# Altium PCB MB1455.PcbDoc (part 1 of 2)
Units mm, origin at the board's own origin, x right, y up, seen from the top; angles counter-clockwise.
Board outline 18.54 x 50.29 mm, 4 copper layers (Top Layer, Inner 1, Inner 2, Bottom Layer), stack 1.577 mm thick; 92 components, 84 nets, 350 pads, 195 vias.
Unrouted connection lines stored in the file: 7.
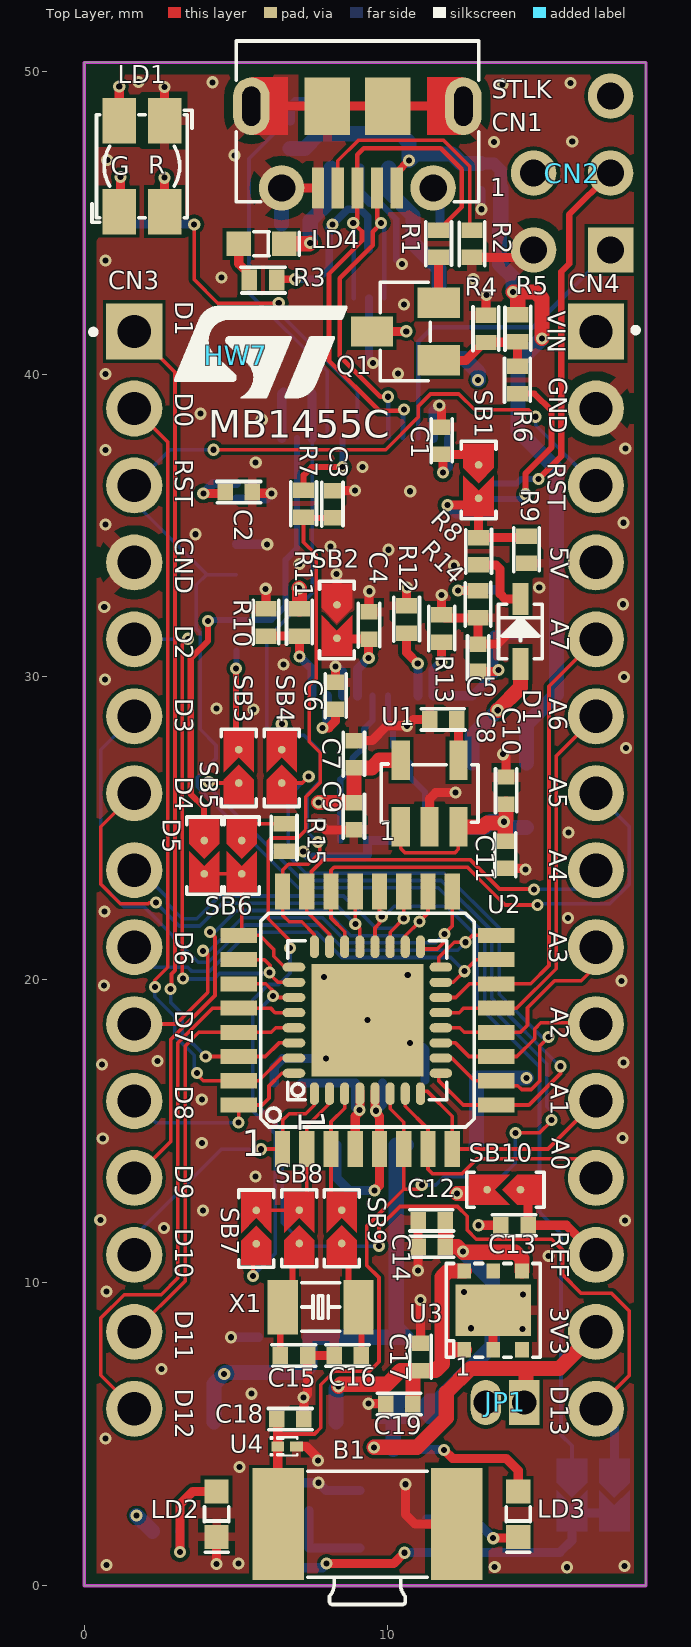
[diagram p0: Top Layer view]
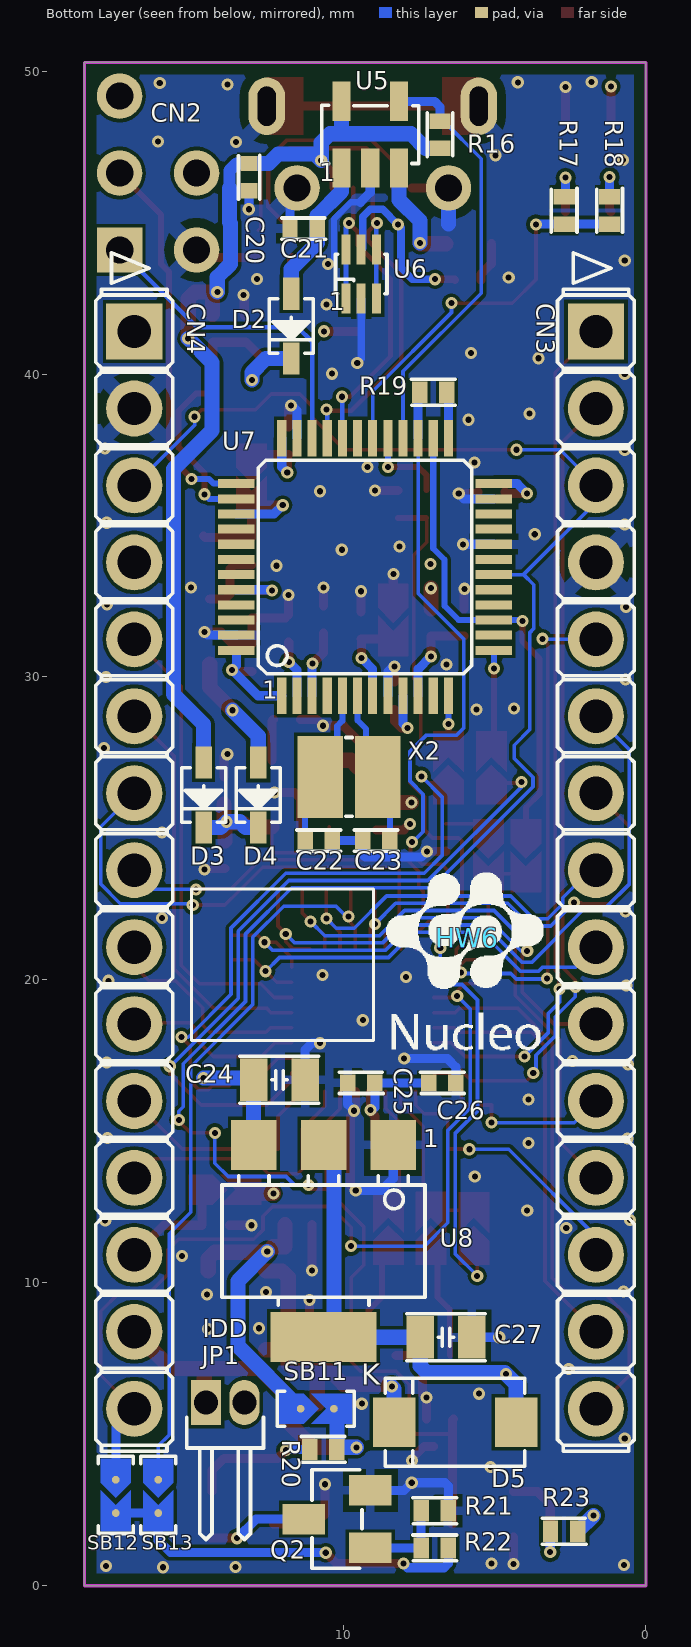
[diagram p1: Bottom Layer view, seen from below]
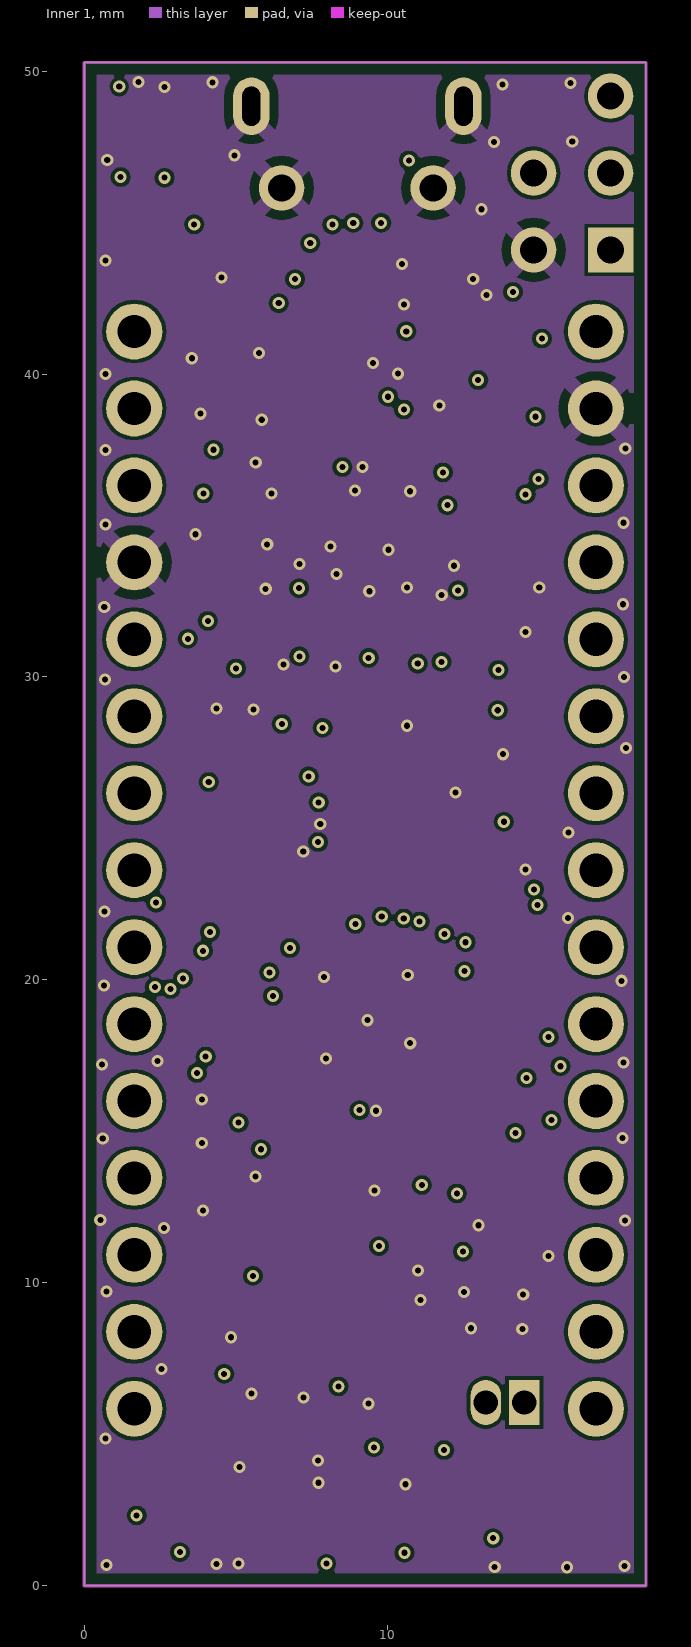
[diagram p2: Inner 1]
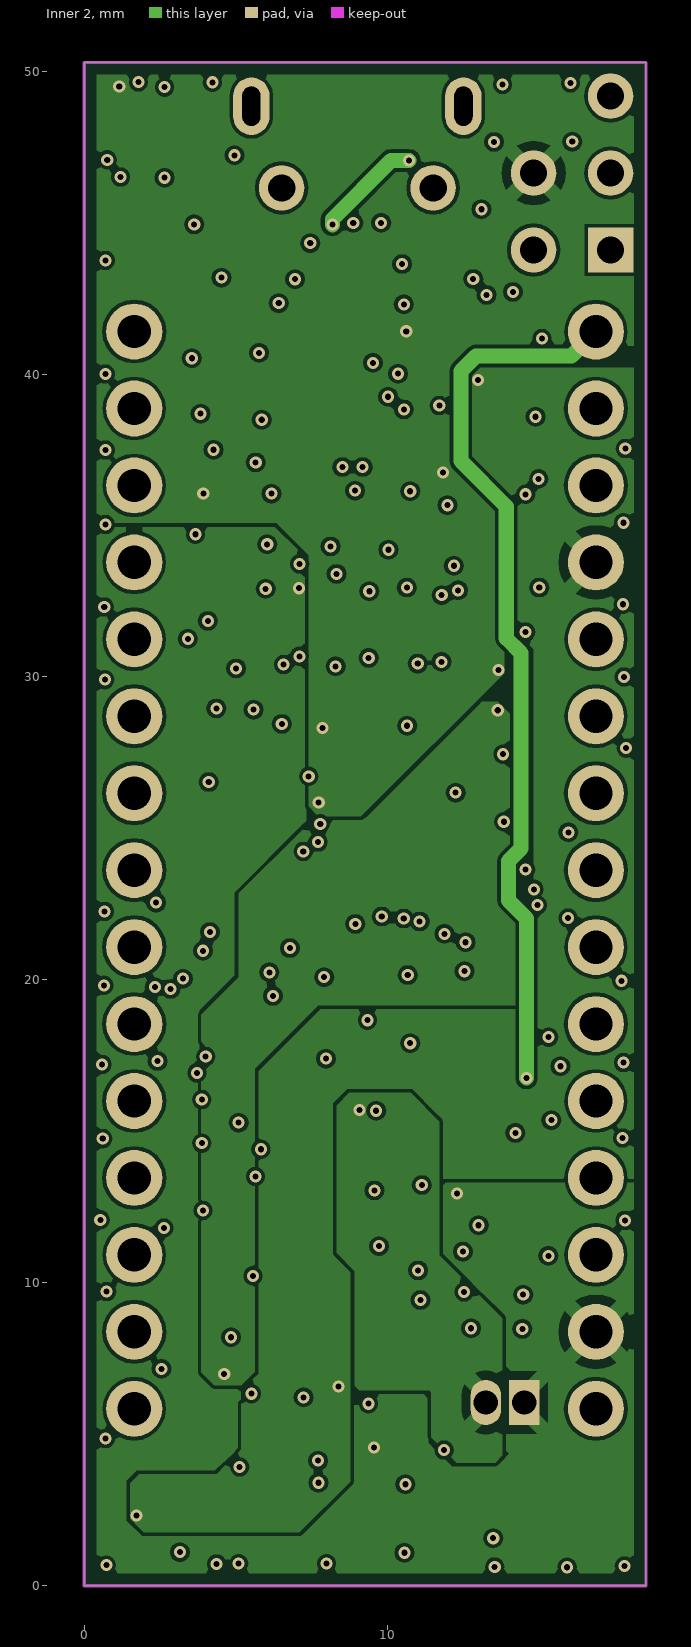
[diagram p3: Inner 2]
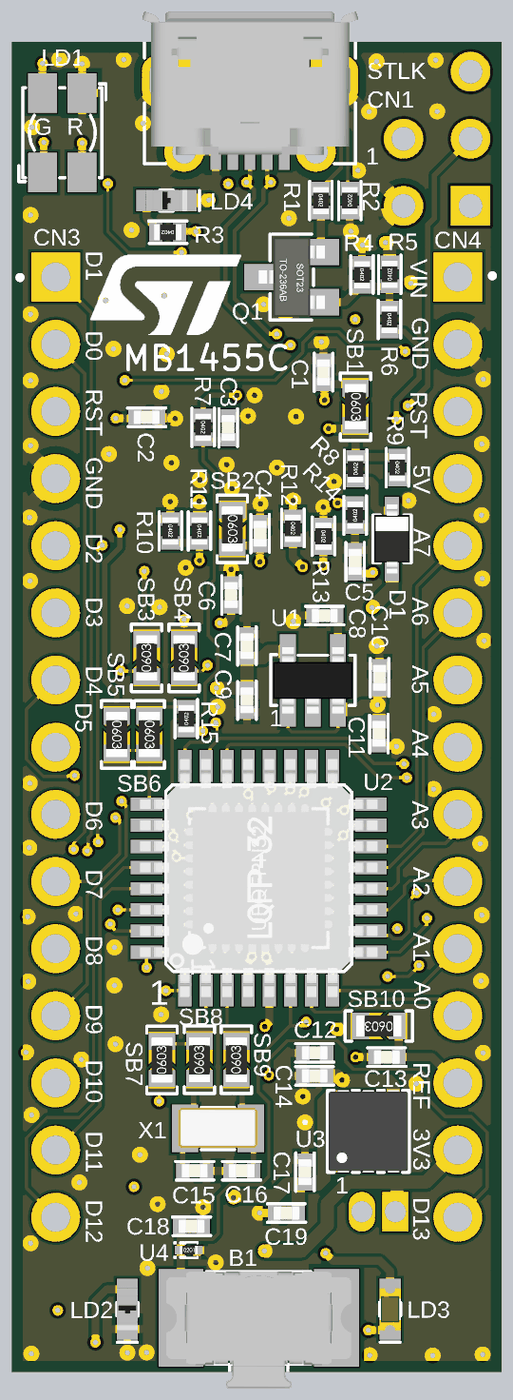
[diagram p5: 3D render of the assembled board from above, using the file's embedded part models]
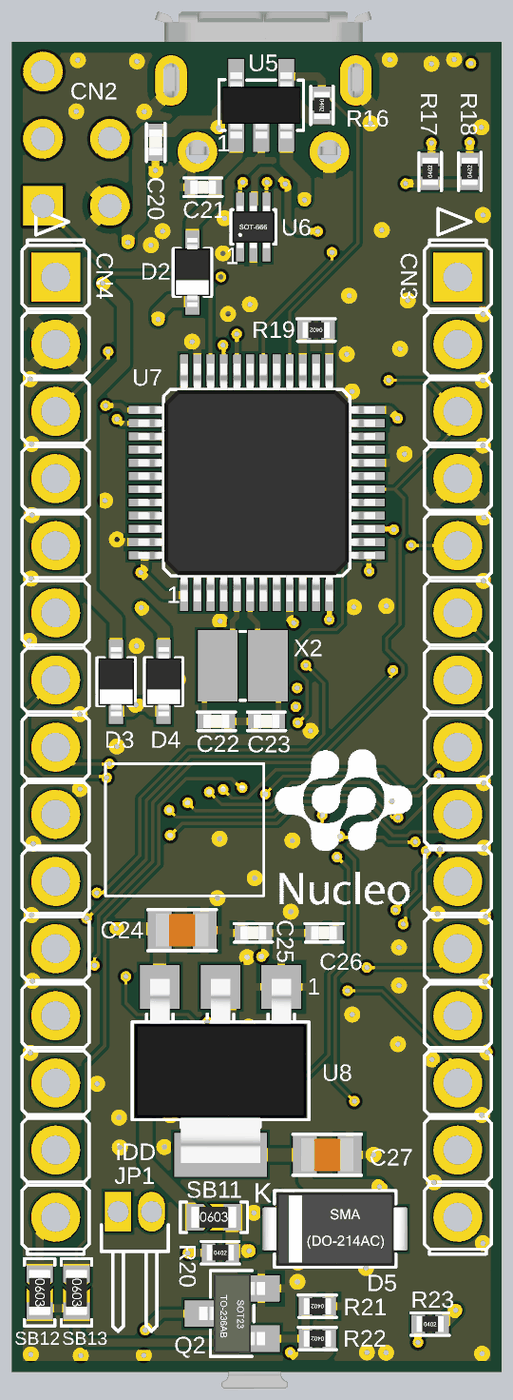
[diagram p6: 3D render of the assembled board from below, using the file's embedded part models]

## Layer stack, top to bottom
Top Solder: solder mask 0.015, Solder Resist, Dk 3.5
Top Layer: signal copper 0.035
Dielectric 1: core 0.254, FR-4, Dk 4.2
Inner 1: signal copper 0.036
Dielectric 3: prepreg 0.927, Dk 4.2
Inner 2: signal copper 0.036
Dielectric 2: core 0.254, Dk 4.2
Bottom Layer: signal copper 0.035
Bottom Solder: solder mask 0.015, Solder Resist, Dk 3.5

## Board outline
0,0 18.542,0 18.542,50.292 0,50.292

## Design rules (kind name [scope] priority, off if disabled: settings)
BoardOutlineClearance [OnLayer('Top Layer') or OnLayer('Bottom Layer') or OnLayer('Inner 1') or OnLayer('Inner 2')] p1: gap=0.4 ignorepadtopadclearanceinfootprint=FALSE
Clearance [All] p1: gap=0.12 ignorepadtopadclearanceinfootprint=FALSE
ComponentClearance [All] p1: gap=0.2 collisioncheckmode=3 verticalgap=0.2 showdistances=FALSE
DiffPairsRouting [All] p1: maxlimit=0.254 minlimit=0.2 mostfreqgap=0.254 toplayer_minwidth=0.152 toplayer_maxwidth=0.381 toplayer_prefwidth=0.381 midlayer1_minwidth=0.152 midlayer1_maxwidth=0.381 midlayer1_prefwidth=0.381 midlayer2_minwidth=0.152 midlayer2_maxwidth=0.381 midlayer2_prefwidth=0.381 bottomlayer_minwidth=0.152 bottomlayer_maxwidth=0.381 bottomlayer_prefwidth=0.381 maxuncoupledlength=25
HoleSize [All] p1: absolutevalues=TRUE maxlimit=10 minlimit=0.025 maxpercent=80.000 minpercent=20.000
MinimumSolderMaskSliver [All] p1: minsoldermaskwidth=0.1
PlaneConnect [All] p1: planeconnectstyle=Relief reliefexpansion=0.508 reliefentries=4 reliefconductorwidth=0.21 reliefairgap=0.21
PolygonConnect [All] p1: thpad.connectstyle=Relief thpad.reliefconductorwidth=0.5 thpad.reliefentries=4 thpad.polygonreliefangle="45 Angle" thpad.airgapwidth=0.3 smdpad.connectstyle=Relief smdpad.reliefconductorwidth=0.3 smdpad.reliefentries=4 smdpad.polygonreliefangle="90 Angle" smdpad.airgapwidth=0.2 via.connectstyle=Direct via.reliefconductorwidth=0.2 via.reliefentries=4 via.polygonreliefangle="90 Angle" via.airgapwidth=0.2
RoutingVias [All] p1: holewidth=0.3 width=0.8 viastyle="Through Hole" minholewidth=0.2 minwidth=0.4 maxholewidth=0.3 maxwidth=1.5
SilkToSilkClearance [All] p1: silktosilkclearance=0.1
SilkToSolderMaskClearance [IsPad] p1: minsilkscreentomaskgap=0.2 clearancetoexposedcopper=TRUE
SolderMaskExpansion SolderMaskExpansion_via [IsVia] p1: expansion=0.05 soldermaskfromhole=TRUE
SolderMaskExpansion [All] p2: expansion=0.102
Width [All] p1: maxlimit=1 minlimit=0.12 preferedwidth=0.254 toplayer_prefwidth=0.2 midlayer1_maxwidth=0.512 midlayer2_maxwidth=0.512 bottomlayer_prefwidth=0.2 minimp=50.000000 maximp=50.000000 favimp=50.000000
23 further rules are at their usual default settings.

## Classes and differential pairs
component class Mechanical: HW3 HW6 HW7
component class U_Power: C7 C8 C9 C10 C11 C12 C14 C17 C19 C24 C27 D2 D3 D4 D5 JP1 LD2 R23 SB11 U1 U3 U8
component class U_ST_LINK_V2-1: C1 C2 C3 C4 C5 C6 C20 C21 C22 C23 CN1 CN2 D1 LD1 LD4 Q1 R1 R2 R3 R4 R5 R6 R7 R8 R9 R10 R11 R12 R13 R14 R16 R17 R18 R19 SB1 SB2 SB3 SB4 U5 U6 U7 X2
component class U_STM32G0_microcontroller: B1 C13 C15 C16 C18 C25 C26 CN3 CN4 LD3 Q2 R15 R20 R21 R22 SB5 SB6 SB7 SB8 SB9 SB10 SB12 SB13 U2 U4 X1
differential pair STLK_USB_D: +STLK_USB_D_P -STLK_USB_D_N

## Components (designator, comment, footprint, x,y, rotation, side; value= is the part's Value field where it differs from the comment)
B1 "SW-PB" SWI_C&K_ITT_KSS221G 9.347,2.032 r0 top locked value=KSS221GLFS
C1 "Capacitor" C0402 11.8,37.8 r270 top value=100nF
C2 "Capacitor" C0402 5.1,36.1 r180 top value=100nF
C3 "Capacitor" C0402 8.19,35.7 r270 top value=20pF
C4 "Capacitor" C0402 9.4,31.7 r270 top value=100nF
C5 "Capacitor" C0402 13,30.634 r270 top value=100nF
C6 "Capacitor" C0402 8.3,29.38 r270 top value=100nF
C7 "Capacitor" C0402 8.9,27.45 r270 top value=100nF
C8 "Capacitor" C0402 11.85,28.6 r0 top value=10nF
C9 "Capacitor" C0402 8.9,25.4 r90 top value=1uF
C10 "Capacitor" C0402 13.926,26.248 r270 top value=1uF
C11 "Capacitor" C0402 13.9,24.132 r90 top value=100nF
C12 "Capacitor" C0402 11.47,12.06 r0 top value=1uF
C13 "Capacitor" C0402 14.2,11.9 r0 top value=100nF
C14 "Capacitor" C0402 11.47,11.19 r0 top value=100nF
C15 "Capacitor" C0402 6.921,7.6 r180 top value=5.6pF
C16 "Capacitor" C0402 8.7,7.6 r0 top value=5.6pF
C17 "Capacitor" C0402 11.1,7.55 r270 top value=100nF
C18 "Capacitor" C0402 6.8,5.5 r180 top value=100nF
C19 "Capacitor" C0402 10.4,6 r0 top value=1uF
C20 "Capacitor" C0402 13.1,46.5 r90 bottom value=1uF
C21 "Capacitor" C0402 11.3,44.8 r180 bottom value=100nF
C22 "Capacitor" C0402 10.8,24.6 r0 bottom value=10pF
C23 "Capacitor" C0402 8.9,24.6 r180 bottom value=10pF
C24 "Capacitor" C0805 12.1,16.7 r0 bottom value=10uF
C25 "Capacitor" C0402 9.4,16.6 r180 bottom value=100nF
C26 "Capacitor" C0402 6.722,16.6 r0 bottom value=4.7uF
C27 "Capacitor" C0805 6.6,8.204 r0 bottom value=10uF
CN1 "USB_uB_105017.0001" CON_USBMICROB_MOLEX_105017-0001_H2P90 9.017,50.292 r180 top locked value=USB_uB_105017-0001
CN2 "Header STLINK" HDR_1x5_2R54_V_M 17.374,44.094 r90 top locked
CN3 "Header 15x1" CON_LYCN_313115S161145 1.651,23.622 r270 bottom locked value="Header 15X1"
CN4 "Header 15x1" CON_LYCN_313115S161145 16.891,23.622 r270 bottom locked value="Header 15X1"
D1 "BAT60JFILM" DIO_SOD323 14.4,31.5 r90 top
D2 "BAT60JFILM" DIO_SOD323 11.71,41.58 r270 bottom
D3 "BAT60JFILM" DIO_SOD323 14.6,26.1 r270 bottom
D4 "BAT60JFILM" DIO_SOD323 12.8,26.1 r270 bottom
D5 "STPS1L40M" DIO_SMA_1A_2K 6.3,5.4 r180 bottom locked value=STPS1L30A
HW6 "Logo" LOGO_NUCLEO 5.9,21.39 r180 bottom value="LOGO NUCLEO"
HW7 "Logo" ST_LOGO_5mm 5,40.6 r0 top value="LOGO ST"
JP1 "Jumper_Header1.27 2x1 Fitted" CON_WP_707-2-02-2-20-00 13.89,6.05 r180 top value="Shunt Fitted"
LD1 "LD_BICOLOR_CMS" LED_BI-GR_HSMF-A201-A00J1 1.905,46.863 r180 top locked
LD2 "LED_red" LED_0603_RED_H0P4 4.369,2.362 r270 top locked value=RED
LD3 "LED_green" LED_0603_GREEN 14.326,2.362 r270 top locked value=GREEN
LD4 "LED_red" LED_0603_RED_H0P4 5.85,44.3 r0 top value=RED
Q1 "9013-SOT23" NPN_SOT23 10.6,41.402 r90 top value="NPN SOT23"
Q2 "9013-SOT23" NPN_SOT23 10.2,2.2 r90 bottom value="NPN SOT23"
R1 "Resistor" R0402 11.7,44.3 r270 top value=1K5
R2 "Resistor" R0402 12.8,44.3 r90 top value=100K
R3 "Resistor" R0402 5.9,43.1 r180 top value=1K
R4 "Resistor" R0402 13.26,41.49 r270 top value=36K
R5 "Resistor" R0402 14.313,41.51 r90 top value=10K
R6 "Resistor" R0402 14.3,39.8 r270 top value=100R
R7 "Resistor" R0402 7.24,35.72 r270 top value=100R
R8 "Resistor" R0402 13.017,34.15 r90 top value=2K7
R9 "Resistor" R0402 14.6,34.2 r270 top value=4K7
R10 "Resistor" R0402 6,31.8 r270 top value=4K7
R11 "Resistor" R0402 7.1,31.8 r270 top value=4K7
R12 "Resistor" R0402 10.643,31.9 r270 top value=10K
R13 "Resistor" R0402 11.8,31.6 r270 top value=10K
R14 "Resistor" R0402 13,32.4 r90 top value=100K
R15 "Resistor" R0402 6.6,24.7 r90 top value=10K
R16 "Resistor" R0402 6.8,47.9 r270 bottom value=10K
R17 "Resistor" R0402 2.7,45.4 r90 bottom value=330R
R18 "Resistor" R0402 1.2,45.4 r90 bottom value=330R
R19 "Resistor" R0402 7.021,39.4 r0 bottom value=100R
R20 "Resistor" R0402 10.65,4.5 r180 bottom value=510R
R21 "Resistor" R0402 6.971,2.475 r0 bottom value=100K
R22 "Resistor" R0402 6.971,1.25 r0 bottom value=47K
R23 "Resistor" R0402 2.7,1.8 r180 bottom value=1K
SB1 "SB_OFF" SOLDER-BRIDGE_R0603-0R 13.017,36.5 r270 top
SB2 "SB_OFF" SOLDER-BRIDGE_R0603-0R 8.343,31.88 r270 top
SB3 "SB_ON" SOLDER-BRIDGE_R0603-0R 5.1,27 r90 top
SB4 "SB_ON" SOLDER-BRIDGE_R0603-0R 6.521,27 r90 top
SB5 "SB_ON" SOLDER-BRIDGE_R0603-0R 3.96,24.1 r270 top
SB6 "SB_OFF" SOLDER-BRIDGE_R0603-0R 5.2,24.1 r270 top
SB7 "SB_OFF" SOLDER-BRIDGE_R0603-0R 5.68,11.79 r90 top
SB8 "SB_ON" SOLDER-BRIDGE_R0603-0R 7.1,11.8 r90 top
SB9 "SB_ON" SOLDER-BRIDGE_R0603-0R 8.5,11.8 r90 top
SB10 "SB_ON" SOLDER-BRIDGE_R0603-0R 13.9,13.075 r180 top
SB11 "SB_ON" SOLDER-BRIDGE_R0603-0R 10.9,5.842 r180 bottom
SB12 "SB_OFF" SOLDER-BRIDGE_R0603-0R 17.5,3 r270 bottom
SB13 "SB_ON" SOLDER-BRIDGE_R0603-0R 16.1,3 r270 bottom
U1 "LDK120M33R" REG_SOT23-5L 11.4,26.15 r0 top
U2 "STM32G031K8T6U" ICC_LQFP32_7X7_P080__UFQFPN32-EPAD_5X5_P050__DI 9.347,18.669 r0 top
U3 "LD39050PU33R" ICC_DFN6-EPAD_3X3_P095 13.5,9.09 r0 top
U4 "ESD-TRANSIL" ESD_ST0201 6.7,4.6 r0 top value=ESDALC6V1-1U2
U5 "STMPS2141STR" MOS_SOT23-5L 9.1,47.9 r180 bottom
U6 "USBLC6-2P6" ESD_SOT666 9.4,43.3 r180 bottom
U7 "STM32F103CBT6" ICC_LQFP48_7X7_P050 9.271,33.63 r180 bottom locked
U8 "LD1117S50TR" REG_SOT223-TAB 10.643,11.379 r0 bottom
X1 "XTAL_2_PINS" CRY_NX3215SA_2P 7.8,9.2 r0 top value="NX3215SA 32.768KHz"
X2 "XTAL_2_PINS" CRY_NX3225GD_2P 9.8,26.7 r180 bottom value="NX3225GD 8MHz"

## Footprints (in the part's own frame and the unit in brackets; to place one, negate y for a bottom-side part, rotate by r counter-clockwise, add the part's x,y. Pads: shape width x height; smd on the part's side, far side on the other; paste and mask are expansions set on the pad)
C0402 [mm]
  rect 0.51x0.56 smd mask+0.05: 1(-0.45,0) 2(0.45,0)
  silkscreen extent -0.72,-0.35 0.72,0.35, body extent -0.5,-0.3 0.5,0.3, height 0.4
C0805 [mm]
  rect 0.9x1.4 smd mask+0.05: 1(-0.85,0) 2(0.85,0)
  silkscreen extent -1.3,-0.77 1.3,0.77, body extent -1.1,-0.7 1.1,0.7, height 1.35
CON_LYCN_313115S161145 [mm]
  rect 1.85x1.85 / inner round 1.85 / far side rect 1.85x1.85 hole 1.1 mask+0.05: 1(-17.78,0)
  round 1.85 hole 1.1 mask+0.05: 2(-15.24,0) 3(-12.7,0) 4(-10.16,0) 5(-7.62,0) 6(-5.08,0) 7(-2.54,0) 8(0,0) 9(2.54,0) 10(5.08,0) 11(7.62,0) 12(10.16,0) 13(12.7,0) 14(15.24,0) 15(17.78,0)
  silkscreen extent -20.38,-1.27 19.18,1.27, body extent -19.18,-1.27 19.18,1.27, height 8.5
CON_USBMICROB_MOLEX_105017-0001_H2P90 [mm]
  rect 0.4x1.35 smd mask+0.05: 1(-1.3,4.15) 2(-0.65,4.15) 3(0,4.15) 4(0.65,4.15) 5(1.3,4.15)
  round 1.5 hole 0.9 mask+0.05: 6(-2.5,4.15) 7(2.5,4.15)
  oval 1.2x1.9 hole 0.6 slot 1.3 at 90 deg mask+0.05: 8(3.5,1.45) 9(-3.5,1.45)
  rect 1.5x1.9 smd mask+0.05: 10(-1,1.45) 11(1,1.45)
  Top Layer region: 2.3,2.4 3.5,2.4 3.5,0.5 2.3,0.5
  Top Layer region: -3.5,2.4 -2.3,2.4 -2.3,0.5 -3.5,0.5
  silkscreen extent -4,-0.7 4,4.6, body extent -4.1,-1.15 4.1,4.66, height 2.9
CON_WP_707-2-02-2-20-00 [mm]
  rect 1x1.5 hole 0.8 mask+0.05: 1(-0.635,0)
  oval 1x1.5 hole 0.8 mask+0.05: 2(0.635,0)
CRY_NX3215SA_2P [mm]
  rect 1x1.8 smd mask+0.05: 1(-1.25,0) 2(1.25,0)
  silkscreen extent -0.63,-0.8 0.63,0.8, body extent -1.65,-0.8 1.65,0.8, height 0.9
CRY_NX3225GD_2P [mm]
  rect 1.5x2.7 smd mask+0.05: 1(-0.95,0) 2(0.95,0)
  silkscreen extent -0.1,-1.3 0.1,1.3, body extent -1.65,-1.3 1.65,1.3, height 1
DIO_SMA_1A_2K [mm]
  rect 1.4x1.64 smd mask+0.05: 1(2.015,0) 2(-2.015,0)
  silkscreen extent -2.3,-1.45 2.3,1.45, body extent -2.75,-1.45 2.75,1.45, height 2.7
DIO_SOD323 [mm]
  rect 1.06x0.54 smd mask+0.05: 1(-1.07,0) 2(1.07,0)
  silkscreen extent -0.9,-0.72 0.9,0.72, body extent -1.3,-0.78 1.3,0.78, height 1.17
ESD_SOT666 [mm]
  rect 0.3x0.99 smd mask+0.05: 1(-0.5,-0.805) 2(0,-0.805) 3(0.5,-0.805) 4(0.5,0.805) 5(0,0.805) 6(-0.5,0.805)
  silkscreen extent -0.85,-0.65 0.85,0.65, body extent -0.85,-0.8 0.85,0.8, height 0.6
ESD_ST0201 [mm]
  rect 0.425x0.33 smd mask+0.05: 1(-0.312,0) 2(0.312,0)
  silkscreen extent -0.55,-0.3 0.33,0.3, body extent -0.34,-0.18 0.34,0.18, height 0.34
HDR_1x5_2R54_V_M [mm] "Header IDC, 2 x 4 Pin Vertical 2.54mm Pitch (Non-Boxed, Male)"
  rect 1.5x1.5 hole 0.9: 1(0,0)
  round 1.5 hole 0.9: 2(0,2.54) 3(2.54,0) 4(2.54,2.54) 5(5.08,0)
ICC_DFN6-EPAD_3X3_P095 [mm]
  rect 0.45x0.5 smd mask+0.05: 1(-0.95,-1.3) 2(0,-1.3) 3(0.95,-1.3) 4(0.95,1.3) 5(0,1.3) 6(-0.95,1.3)
  rect 2.5x1.7 smd mask+0.05: EP(0,0)
  silkscreen extent -1.55,-1.55 1.55,1.55, body extent -1.55,-1.55 1.55,1.55, height 1
ICC_LQFP32_7X7_P080__UFQFPN32-EPAD_5X5_P050__DI [mm] "MCD-01396"
  rect 0.5x1.2 smd mask+0.05: 1(-2.8,-4.25) 2(-2,-4.25) 3(-1.2,-4.25) 4(-0.4,-4.25) 5(0.4,-4.25) 6(1.2,-4.25) 7(2,-4.25) 8(2.8,-4.25) 17(2.8,4.25) 18(2,4.25) 19(1.2,4.25) 20(0.4,4.25) 21(-0.4,4.25) 22(-1.2,4.25) 23(-2,4.25) 24(-2.8,4.25)
  oval 0.3x0.75 smd mask+0.05: 1(-1.75,-2.425) 2(-1.25,-2.425) 3(-0.75,-2.425) 4(-0.25,-2.425) 5(0.25,-2.425) 6(0.75,-2.425) 7(1.25,-2.425) 8(1.75,-2.425) 17(1.75,2.425) 18(1.25,2.425) 19(0.75,2.425) 20(0.25,2.425) 21(-0.25,2.425) 22(-0.75,2.425) 23(-1.25,2.425) 24(-1.75,2.425)
  oval 0.75x0.3 smd mask+0.05: 9(2.425,-1.75) 10(2.425,-1.25) 11(2.425,-0.75) 12(2.425,-0.25) 13(2.425,0.25) 14(2.425,0.75) 15(2.425,1.25) 16(2.425,1.75) 25(-2.425,1.75) 26(-2.425,1.25) 27(-2.425,0.75) 28(-2.425,0.25) 29(-2.425,-0.25) 30(-2.425,-0.75) 31(-2.425,-1.25) 32(-2.425,-1.75)
  rect 1.2x0.5 smd mask+0.05: 9(4.25,-2.8) 10(4.25,-2) 11(4.25,-1.2) 12(4.25,-0.4) 13(4.25,0.4) 14(4.25,1.2) 15(4.25,2) 16(4.25,2.8) 25(-4.25,2.8) 26(-4.25,2) 27(-4.25,1.2) 28(-4.25,0.4) 29(-4.25,-0.4) 30(-4.25,-1.2) 31(-4.25,-2) 32(-4.25,-2.8)
  rect 3.7x3.7 smd mask+0.05: 33(0,0)
  silkscreen extent -3.52,-3.52 3.52,3.52, body extent -4.5,-4.5 4.5,4.5, height 1.63
ICC_LQFP48_7X7_P050 [mm]
  rect 0.3x1.2 smd mask+0.05: 1(-2.75,-4.25) 2(-2.25,-4.25) 3(-1.75,-4.25) 4(-1.25,-4.25) 5(-0.75,-4.25) 6(-0.25,-4.25) 7(0.25,-4.25) 8(0.75,-4.25) 9(1.25,-4.25) 10(1.75,-4.25) 11(2.25,-4.25) 12(2.75,-4.25) 25(2.75,4.25) 26(2.25,4.25) 27(1.75,4.25) 28(1.25,4.25) 29(0.75,4.25) 30(0.25,4.25) 31(-0.25,4.25) 32(-0.75,4.25) 33(-1.25,4.25) 34(-1.75,4.25) 35(-2.25,4.25) 36(-2.75,4.25)
  rect 1.2x0.3 smd mask+0.05: 13(4.25,-2.75) 14(4.25,-2.25) 15(4.25,-1.75) 16(4.25,-1.25) 17(4.25,-0.75) 18(4.25,-0.25) 19(4.25,0.25) 20(4.25,0.75) 21(4.25,1.25) 22(4.25,1.75) 23(4.25,2.25) 24(4.25,2.75) 37(-4.25,2.75) 38(-4.25,2.25) 39(-4.25,1.75) 40(-4.25,1.25) 41(-4.25,0.75) 42(-4.25,0.25) 43(-4.25,-0.25) 44(-4.25,-0.75) 45(-4.25,-1.25) 46(-4.25,-1.75) 47(-4.25,-2.25) 48(-4.25,-2.75)
  silkscreen extent -3.52,-3.52 3.52,3.52, body extent -4.5,-4.5 4.5,4.5, height 1.6
LED_0603_GREEN [mm]
  rect 0.8x0.8 smd mask+0.05: 1(-0.75,0) 2(0.75,0)
  silkscreen extent -0.25,-0.4 1.25,0.4, body extent -0.8,-0.4 0.8,0.4, height 0.6
LED_0603_RED_H0P4 [mm]
  rect 0.8x0.8 smd mask+0.05: 1(-0.75,0) 2(0.75,0)
  silkscreen extent -0.25,-0.4 1.25,0.4, body extent -0.8,-0.4 0.79,0.4, height 0.4
LED_BI-GR_HSMF-A201-A00J1 [mm]
  rect 1.1x1.5 smd mask+0.05: 1(-0.75,-1.5) 2(-0.75,1.5) 3(0.75,1.5) 4(0.75,-1.5)
  silkscreen extent -1.65,-1.85 1.65,1.85, body extent -1.5,-1.85 1.5,1.85, height 2.1
LOGO_NUCLEO [mm]
  silkscreen extent -2.67,-3.71 2.51,2.13
MOS_SOT23-5L [mm]
  rect 0.6x1.3 smd mask+0.05: 1(-0.95,-1.1) 2(0,-1.1) 3(0.95,-1.1) 4(0.95,1.1) 5(-0.95,1.1)
  silkscreen extent -1.6,-0.95 1.6,0.97, body extent -1.52,-1.25 1.52,1.25, height 1.45
NPN_SOT23 [mm]
  rect 1x1.4 smd mask+0.05: 1(-0.95,-1.1) 2(0.95,-1.1) 3(0,1.1)
  silkscreen extent -1.63,-0.82 1.63,0.82, body extent -1.56,-1.25 1.56,1.25, height 1.1
R0402 [mm]
  rect 0.51x0.7 smd mask+0.05: 1(-0.45,0) 2(0.45,0)
  silkscreen extent -0.72,-0.43 0.72,0.43, body extent -0.52,-0.3 0.52,0.3, height 0.4
REG_SOT23-5L [mm]
  rect 0.6x1.3 smd mask+0.05: 1(-0.95,-1.1) 2(0,-1.1) 3(0.95,-1.1) 4(0.95,1.1) 5(-0.95,1.1)
  silkscreen extent -1.6,-0.95 1.6,0.97, body extent -1.52,-1.25 1.52,1.25, height 1.1
REG_SOT223-TAB [mm]
  rect 1.5x1.65 smd mask+0.05: 1(-2.3,-3.175) 2(0,-3.175) 3(2.3,-3.175)
  rect 3.5x1.65 smd mask+0.05: 4(0,3.175)
  silkscreen extent -3.35,-2.15 3.35,2.12, body extent -3.35,-3.48 3.35,3.48, height 1.8
SOLDER-BRIDGE_R0603-0R [mil]
  round 10 smd paste-393.7: 1(-19.68,0) 2(23.62,0)
  Top Layer region: -5.91,19.68 13.78,0 -5.91,-19.69 47.24,-19.69 47.24,19.68
  Top Layer region: -47.24,-19.69 -47.24,19.68 -15.75,19.68 3.94,0 -15.75,-19.69
  silkscreen extent -50,-23 50,23, body extent -36,-20 36,20, height 22
ST_LOGO_5mm [mm]
  silkscreen extent -2.03,-1.39 3.68,1.65
SWI_C&K_ITT_KSS221G [mm] "MCD-01335"
  rect 1.7x3.7 smd mask+0.05: 1(-2.95,0) 2(2.95,0)
  silkscreen extent -1.97,-2.65 1.97,1.75, body extent -3.5,-2.65 3.5,1.76, height 1.7

## Part data
B1: library part MCD-01335, "Subminiature Side Actuated Tact Switch for SMT - KSS series - 2.0 Newtons - Gull wing, SPST", Manufacturer=C&K, Manufacturer_Part_Number=KSS221GLFS, ComponentLink1Description=Datasheet, ComponentLink1URL=http://tunmcdsvn.tun.st.com/Component_Datasheet_Library/Trunk/Misc/C&K_switch_button_KSS221GLFS/C&K_SWITCH_KSS221GLFS.pdf, ECCN_EU=NEC, ECCN_US=EAR99, Internal_Part_Number=MCD-01335, Part_Type=Misc, Provided_By=SUBCO, Status=Checked
C1 C2 C4 C5 C6 C7 C11 C13 C14 C17 C18 C21 C25: library part MCD-00102, "Capacitor, MLCC, 100nF, 16V, X7R, 10%, 0402, T=0,5mm", Alternate_Manufacturer=MURATA, Alternate_Manufacturer_Part_Number=GCM155R71C104KA55D, Manufacturer=YAGEO, Manufacturer_Part_Number=CC0402KRX7R7BB104, Package=C0402, ComponentLink1Description=Datasheet, ComponentLink1URL=http://tunmcdsvn.tun.st.com/Component_Datasheet_Library/Trunk/Capacitors/Yageo_Multilayer_Capacitor_X7R_series_100pF_to_22uF, ECCN_EU=NEC, ECCN_US=EAR99, Internal_Part_Number=MCD-00102, Part_Type=Capacitor, Provided_By=SUBCO, Status=Released
C3: library part MCD-00016, "Capacitor, MLCC, 20pF, 50V, NPO, 5%, 0402, T=0,5mm", Manufacturer=YAGEO, Manufacturer_Part_Number=CC0402JRNPO9BN200, Package=C0402, ComponentLink1Description=Datasheet, ComponentLink1URL=http://tunmcdsvn.tun.st.com/Component_Datasheet_Library/Trunk/Capacitors/Yageo_Capacitor_NP0_16V-to-50V, ECCN_EU=NEC, ECCN_US=EAR99, Internal_Part_Number=MCD-00016, Part_Type=Capacitor, Provided_By=SUBCO, Status=Released
C8: library part MCD-00011, "Capacitor, MLCC, 10nF, 16V, X7R, 10%, 0402, T=0.5mm", Manufacturer=YAGEO, Manufacturer_Part_Number=CC0402KRX7R7BB103, Package=C0402, ComponentLink1Description=Datasheet, ComponentLink1URL=http://tunmcdsvn.tun.st.com/Component_Datasheet_Library/Trunk/Capacitors/Yageo_Multilayer_Capacitor_X7R_series_100pF_to_22uF, ECCN_EU=NEC, ECCN_US=EAR99, Internal_Part_Number=MCD-00011, Part_Type=Capacitor, Provided_By=SUBCO, Status=Released
C9 C10 C12 C19 C20: library part MCD-00095, "Capacitor, MLCC, 1uF, 6V3, X5R, 10%, 0402, T=0,5mm", Alternate_Manufacturer=MURATA, Alternate_Manufacturer_Part_Number=GRM155R60J105KE19, Manufacturer_Part_Number=GRM155R61E105KA12, Package=C0402, ComponentLink1Description=Datasheet, ComponentLink1URL=http://tunmcdsvn.tun.st.com/Component_Datasheet_Library/Trunk/Capacitors/Murata_Capacitor_GR_series, ECCN_EU=NEC, ECCN_US=EAR99, Internal_Part_Number=MCD-00095, Manufacturer=MURATA, Part_Type=Capacitor, Provided_By=SUBCO, Status=Released
C15 C16: library part MCD-01374, "Capacitor, MLCC, 5.6pF, 50V, NPO, +/- 0.1pF, 0402, T=0,5mm", Manufacturer=YAGEO, Manufacturer_Part_Number=CC0402BRNPO9BN5R6, Package=C0402, ComponentLink1Description=Datasheet, ComponentLink1URL=http://tunmcdsvn.tun.st.com/Component_Datasheet_Library/Trunk/Capacitors/Yageo_Capacitor_NP0_16V-to-50V, ECCN_EU=N/A, ECCN_US=N/A, Internal_Part_Number=MCD-01374, Part_Type=Capacitor, Provided_By=SUBCO, Status=Released
C22 C23: library part MCD-00015, "Capacitor, MLCC, 10pF, 50V, NPO, 5%, 0402, T=0,5mm", Manufacturer=YAGEO, Manufacturer_Part_Number=CC0402JRNPO9BN100, Package=C0402, ComponentLink1Description=Datasheet, ComponentLink1URL=http://tunmcdsvn.tun.st.com/Component_Datasheet_Library/Trunk/Capacitors/Yageo_Capacitor_NP0_16V-to-50V, ECCN_EU=NEC, ECCN_US=EAR99, Internal_Part_Number=MCD-00015, Part_Type=Capacitor, Provided_By=SUBCO, Status=Released
C24 C27: library part MCD-00014, "Capacitor, MLCC, 10uF, 25V, X5R, 10%, 0805, T=0,85mm", Manufacturer=YAGEO, Manufacturer_Part_Number=CC0805KRX5R8BB106, Package=C0805, ComponentLink1Description=Datasheet, ComponentLink1URL=http://tunmcdsvn.tun.st.com/Component_Datasheet_Library/Trunk/Capacitors/Yageo_Multilayer_capacitor_X5R_series_100pF_to_100uF, ECCN_EU=NEC, ECCN_US=EAR99, Internal_Part_Number=MCD-00014, Part_Type=Capacitor, Provided_By=SUBCO, Status=Released
C26: library part MCD-00096, "Capacitor, MLCC, 4.7uF, 6V3, X5R, 20%, 0402, T=0,5mm", Manufacturer=MURATA, Manufacturer_Part_Number=GRM155R60J475ME87, Package=C0402, ComponentLink1Description=Datasheet, ComponentLink1URL=http://tunmcdsvn.tun.st.com/Component_Datasheet_Library/Trunk/Capacitors/Murata_Capacitor_GR_series, ECCN_EU=NEC, ECCN_US=EAR99, Internal_Part_Number=MCD-00096, Part_Type=Capacitor, Provided_By=SUBCO, Status=Obsolete
CN1: library part MCD-00028, "USB-MICRO-B, 0.65mm, RA, SMT, Bottom Mount,", Manufacturer=MOLEX, Manufacturer_Part_Number=1050170001, ComponentLink1Description=Datasheet, ComponentLink1URL=http://tunmcdsvn.tun.st.com/Component_Datasheet_Library/Trunk/Connectors/Molex_Connector-USB-microB_105017-0001, ECCN_EU=n/a, ECCN_US=n/a, Internal_Part_Number=MCD-00028, Part_Type=Connector, Provided_By=SUBCO, Status=Released
CN2: library part MCD-01399, "Header 5 pads for ST-LINK prog. Not fitted", Manufacturer=n/a, ComponentLink1Description=Datasheet, ECCN_EU=n/a, ECCN_US=n/a, Internal_Part_Number=MCD-01399, Manufacturer_Part_Number=n/a, Part_Type=Mechanical, Provided_By=SUBCO, Status="Footprint available"
CN3 CN4: library part MCD-01332, "Pin header, 15x1, 2,54mm, VR, TH, Height 6mm/6mm", Alternate_Manufacturer=SAMTEC, Alternate_Manufacturer_Part_Number="TSW 115-08-F-S", Manufacturer=LYCONN, Manufacturer_Part_Number=313115S161145, ComponentLink1Description=Datasheet, ComponentLink1URL=http://tunmcdsvn.tun.st.com/Component_Datasheet_Library/Trunk/Connectors/LYCN_3131xxS141, ECCN_EU=n/a, ECCN_US=n/a, Internal_Part_Number=MCD-01332, Part_Type=Connector, Provided_By=SUBCO, Status="Footprint available"
D1 D2 D3 D4: library part MCD-00034, Manufacturer=STMICROELECTRONICS, BMS_Part_Number=9151097, ComponentLink1Description=Datasheet, ComponentLink1URL=http://tunmcdsvn.tun.st.com/Component_Datasheet_Library/Trunk/Diodes/STM_Diode_BAT60JFILM-SOD323, ECCN_EU=NEC, ECCN_US=EAR99, Internal_Part_Number=MCD-00034, Manufacturer_Part_Number=BAT60JFILM, Part_Type=Diode, Provided_By="SUBCO with ST control", Status=Released
D5: library part MCD-01059, "LOW DROP POWER SCHOTTKY RECTIFIER 1A 30V VF=0.3V", Manufacturer=STMICROELECTRONICS, Manufacturer_Part_Number=STPS1L30A, Package=DIO_SMA_1A_2K, BMS_Part_Number=9151096, ComponentLink1Description=Datasheet, ComponentLink1URL=http://tunmcdsvn.tun.st.com/Component_Datasheet_Library/Trunk/Diodes/STM_SCHOTTKY_STPS1L30, ECCN_EU=NEC, ECCN_US=EAR99, Internal_Part_Number=MCD-01059, Part_Type=Diode, Provided_By="SUBCO with ST control", Status="Footprint available"
HW6: library part MCD-00636, "NUCLEO logo footprint for PCB", ComponentLink1Description=Datasheet, ECCN_EU=n/a, ECCN_US=n/a, Internal_Part_Number=MCD-00636, Part_Type=Mechanical, Provided_By=n/a, Status=Released
HW7: library part MCD-00625, "STMicroelectronics logo footprint for PCB", Manufacturer=n/a, ComponentLink1Description=Datasheet, ComponentLink1URL=http://na, ECCN_EU=n/a, ECCN_US=n/a, Internal_Part_Number=MCD-00625, Manufacturer_Part_Number=n/a, Part_Type=Mechanical, Provided_By=n/a, Status=Released
JP1: library part MCD-01428, "Header, 2x1, 1,27mm, Right Angled, Single Row, Height 3.05mm/1.27mm", Manufacturer="W & P Products", Manufacturer_Part_Number=707-2-02-2-20-00, ComponentLink1Description=Datasheet, ComponentLink1URL=http://tunmcdsvn.tun.st.com/Component_Datasheet_Library/Trunk/Connectors/WPPRO_connector_707-series, ECCN_EU=n/a, ECCN_US=n/a, Internal_Part_Number=MCD-01428, Part_Type=Connector, Provided_By=SUBCO, Status=Checked
LD1: library part MCD-00051, "LED Bicolor", Alternate_Manufacturer=EVERLUCK, Alternate_Manufacturer_Part_Number=LE-RGW35280, Manufacturer="AVAGO TECHNOLOGIES", Manufacturer_Part_Number=HSMF-A201-A00J1, ComponentLink1Description=Datasheet, ComponentLink1URL=http://tunmcdsvn.tun.st.com/Component_Datasheet_Library/Trunk/Display/Avago_LED-SMC_HSMx-A2xx-02Feb2012, ECCN_EU=NEC, ECCN_US=EAR99, Internal_Part_Number=MCD-00051, Part_Type=Display, Provided_By=SUBCO, Status=Released
LD2 LD4: library part MCD-00322, "LED, Red, 0603", Manufacturer=EVERLIGHT, Manufacturer_Part_Number=19-217/R6C-AL1M2VY/3T, Package="LED 0603", ComponentLink1Description=Datasheet, ComponentLink1URL=http://tunmcdsvn.tun.st.com/Component_Datasheet_Library/Trunk/Display/Everlight_SMD-LED-RED_19-213-R6C-AP1Q2B-3T-V3.doc, ECCN_EU=NEC, ECCN_US=EAR99, Internal_Part_Number=MCD-00322, Part_Type=Display, Provided_By=SUBCO, Status=Released
LD3: library part MCD-00050, "LED, Green, 0603", Manufacturer=EVERLIGHT, Manufacturer_Part_Number=19-213SYGC/S530-E2/TR8, Package="LED 0603", ComponentLink1Description=Datasheet, ComponentLink1URL=http://tunmcdsvn.tun.st.com/Component_Datasheet_Library/Trunk/Display/Everlight_SMD-LED-GREEN_19-213SYGC-S530-XX-TR8-v3.doc, ECCN_EU=NEC, ECCN_US=EAR99, Internal_Part_Number=MCD-00050, Part_Type=Display, Provided_By=SUBCO, Status=Released
Q1 Q2: library part MCD-00073, "NPN Bipolar Transistor", Alternate_Manufacturer="ON SEMICONDUCTOR", Alternate_Manufacturer_Part_Number="MMBT2222LT1G / MMBT2222ALT1G / MMBT2222ALT3G", Manufacturer_Part_Number=BSR14, Package=SOT23, ComponentLink1Description=Datasheet, ComponentLink1URL=http://tunmcdsvn.tun.st.com/Component_Datasheet_Library/Trunk/IC/NXP_Transistor_BSR14, ECCN_EU=NEC, ECCN_US=EAR99, Internal_Part_Number=MCD-00073, Manufacturer="ON SEMICONDUCTOR", Part_Type=IC, Provided_By=SUBCO, Status=Released
R1: library part MCD-00068, "Resistor,1K5,0402,1%,1/16W", Manufacturer=YAGEO, Manufacturer_Part_Number=RC0402FR-071K5L, Package=R0402, ComponentLink1Description=Datasheet, ComponentLink1URL=http://tunmcdsvn.tun.st.com/Component_Datasheet_Library/Trunk/Resistors/Yageo_Resistor_RC0402-series, ECCN_EU=NEC, ECCN_US=EAR99, Internal_Part_Number=MCD-00068, Part_Type=Resistor, Provided_By=SUBCO, Status=Released
R2 R14 R21: library part MCD-00059, "Resistor,100K,0402,1%,1/16W", Alternate_Manufacturer=YAGEO, Alternate_Manufacturer_Part_Number=RT0402FRE07100KL, Manufacturer_Part_Number=RC0402FR-07100KL, Package=R0402, ComponentLink1Description=Datasheet, ComponentLink1URL=http://tunmcdsvn.tun.st.com/Component_Datasheet_Library/Trunk/Resistors/Yageo_Resistor_RC0402-series, ECCN_EU=NEC, ECCN_US=EAR99, Internal_Part_Number=MCD-00059, Manufacturer=YAGEO, Part_Type=Resistor, Provided_By=SUBCO, Status=Released
R3 R23: library part MCD-00061, "Resistor,1K,0402,1%,1/16W", Manufacturer=YAGEO, Manufacturer_Part_Number=RC0402FR-071KL, Package=R0402, ComponentLink1Description=Datasheet, ComponentLink1URL=http://tunmcdsvn.tun.st.com/Component_Datasheet_Library/Trunk/Resistors/Yageo_Resistor_RC0402-series, ECCN_EU=NEC, ECCN_US=EAR99, Internal_Part_Number=MCD-00061, Part_Type=Resistor, Provided_By=SUBCO, Status=Released
R4: library part MCD-00069, "Resistor,36K,0402,1%,1/16W", Manufacturer=YAGEO, Manufacturer_Part_Number=RC0402FR-0736KL, Package=R0402, ComponentLink1Description=Datasheet, ComponentLink1URL=http://tunmcdsvn.tun.st.com/Component_Datasheet_Library/Trunk/Resistors/Yageo_Resistor_RC0402-series, ECCN_EU=NEC, ECCN_US=EAR99, Internal_Part_Number=MCD-00069, Part_Type=Resistor, Provided_By=SUBCO, Status=Released
R5 R12 R13 R15 R16: library part MCD-00053, "Resistor,10K,0402,1%,1/16W", Manufacturer=YAGEO, Manufacturer_Part_Number=RC0402FR-0710KL, Package=R0402, ComponentLink1Description=Datasheet, ComponentLink1URL=http://tunmcdsvn.tun.st.com/Component_Datasheet_Library/Trunk/Resistors/Yageo_Resistor_RC0402-series, ECCN_EU=NEC, ECCN_US=EAR99, Internal_Part_Number=MCD-00053, Part_Type=Resistor, Provided_By=SUBCO, Status=Released
R6 R7 R19: library part MCD-00067, "Resistor,100R,0402,1%,1/16W", Manufacturer=YAGEO, Manufacturer_Part_Number=RC0402FR-07100RL, Package=R0402, ComponentLink1Description=Datasheet, ComponentLink1URL=http://tunmcdsvn.tun.st.com/Component_Datasheet_Library/Trunk/Resistors/Yageo_Resistor_RC0402-series, ECCN_EU=NEC, ECCN_US=EAR99, Internal_Part_Number=MCD-00067, Part_Type=Resistor, Provided_By=SUBCO, Status=Released
R8: library part MCD-00055, "Resistor,2K7,0402,1%,1/16W", Manufacturer=YAGEO, Manufacturer_Part_Number=RC0402FR-072K7L, Package=R0402, ComponentLink1Description=Datasheet, ComponentLink1URL=http://tunmcdsvn.tun.st.com/Component_Datasheet_Library/Trunk/Resistors/Yageo_Resistor_RC0402-series, ECCN_EU=NEC, ECCN_US=EAR99, Internal_Part_Number=MCD-00055, Part_Type=Resistor, Provided_By=SUBCO, Status=Released
R9 R10 R11: library part MCD-00065, "Resistor,4K7,0402,1%,1/16W", Alternate_Manufacturer=YAGEO, Alternate_Manufacturer_Part_Number=RT0402FRE074K7L, Manufacturer_Part_Number=RC0402FR-074K7L, Package=R0402, ComponentLink1Description=Datasheet, ComponentLink1URL=http://tunmcdsvn.tun.st.com/Component_Datasheet_Library/Trunk/Resistors/Yageo_Resistor_RC0402-series, ECCN_EU=NEC, ECCN_US=EAR99, Internal_Part_Number=MCD-00065, Manufacturer=YAGEO, Part_Type=Resistor, Provided_By=SUBCO, Status=Released
R17 R18: library part MCD-00062, "Resistor,330R,0402,1%,1/16W", Manufacturer=YAGEO, Manufacturer_Part_Number=RC0402FR-07330RL, Package=R0402, ComponentLink1Description=Datasheet, ComponentLink1URL=http://tunmcdsvn.tun.st.com/Component_Datasheet_Library/Trunk/Resistors/Yageo_Resistor_RC0402-series, ECCN_EU=NEC, ECCN_US=EAR99, Internal_Part_Number=MCD-00062, Part_Type=Resistor, Provided_By=SUBCO, Status=Released
R20: library part MCD-00064, "Resistor,510R,0402,1%,1/16W", Manufacturer=YAGEO, Manufacturer_Part_Number=RC0402FR-07510RL, Package=R0402, ComponentLink1Description=Datasheet, ComponentLink1URL=http://tunmcdsvn.tun.st.com/Component_Datasheet_Library/Trunk/Resistors/Yageo_Resistor_RC0402-series, ECCN_EU=NEC, ECCN_US=EAR99, Internal_Part_Number=MCD-00064, Part_Type=Resistor, Provided_By=SUBCO, Status=Released
R22: library part MCD-00063, "Resistor,47K,0402,1%,1/16W", Manufacturer=YAGEO, Manufacturer_Part_Number=RC0402FR-0747KL, Package=R0402, ComponentLink1Description=Datasheet, ComponentLink1URL=http://tunmcdsvn.tun.st.com/Component_Datasheet_Library/Trunk/Resistors/Yageo_Resistor_RC0402-series, ECCN_EU=NEC, ECCN_US=EAR99, Internal_Part_Number=MCD-00063, Part_Type=Resistor, Provided_By=SUBCO, Status=Released
SB1 SB2 SB6 SB7 SB12: library part MCD-00072, "Solder Bridge OFF", Manufacturer=YAGEO, Manufacturer_Part_Number=RC0603JR-070RL, Package=SB0603, ComponentLink1Description=Datasheet, ComponentLink1URL=http://tunmcdsvn.tun.st.com/Component_Datasheet_Library/Trunk/Resistors/Yageo_Resistor_RC0603-series, ECCN_EU=n/a, ECCN_US=n/a, Internal_Part_Number=MCD-00072, Part_Type=Mechanical, Provided_By=SUBCO, Status=Released
SB3 SB4 SB5 SB8 SB9 SB10 SB11 SB13: library part MCD-00071, "Solder Bridge ON", Manufacturer=YAGEO, Manufacturer_Part_Number=RC0603JR-070RL, Package=SB0603, ComponentLink1Description=Datasheet, ComponentLink1URL=http://tunmcdsvn.tun.st.com/Component_Datasheet_Library/Trunk/Resistors/Yageo_Resistor_RC0603-series, ECCN_EU=n/a, ECCN_US=n/a, Internal_Part_Number=MCD-00071, Part_Type=Mechanical, Provided_By=SUBCO, Status=Released
U1: library part MCD-00663, "200 mA low quiescent current very low noise LDO", Manufacturer=STMICROELECTRONICS, Package=SOT23-5L, BMS_Part_Number=9176330, ComponentLink1Description=Datasheet, ComponentLink1URL=http://tunmcdsvn.tun.st.com/Component_Datasheet_Library/Trunk/IC/STM_LDO_LDK120M33R, ECCN_EU=NEC, ECCN_US=EAR99, Internal_Part_Number=MCD-00663, Manufacturer_Part_Number=LDK120M33R, Part_Type=IC, Provided_By="SUBCO with ST control", Status="Footprint available"
U2: library part MCD-01738, "Mainstream Arm Cortex-M0+ MCU with 64 Kbytes of of Flash memory memory, 8 Kbytes RAM, 64 MHz CPU, 2x USART, timers, ADC, comm. I/F, 1.65-3.6V", Manufacturer=STMICROELECTRONICS, Package=LQFP32, ComponentLink1Description=Datasheet, ECCN_EU=NEC, ECCN_US=3A991A2, Internal_Part_Number=MCD-01738, Manufacturer_Part_Number=STM32G031K8T6U, Part_Type=IC, Provided_By="SUBCO with ST control", Status=Checked
U3: library part MCD-00215, "Low quiescent current and low noise voltage regulators", Manufacturer=STMICROELECTRONICS, Package="DFN6 3x3mm", BMS_Part_Number=9176126, ComponentLink1Description=Datasheet, ComponentLink1URL=http://tunmcdsvn.tun.st.com/Component_Datasheet_Library/Trunk/IC/STM_LDO_LD39050PU, ECCN_EU=NEC, ECCN_US=EAR99, Internal_Part_Number=MCD-00215, Manufacturer_Part_Number=LD39050PU33R, Part_Type=IC, Provided_By="SUBCO with ST control", Status=Released
U4: library part MCD-00170, "ESD protection 6V1", Manufacturer=STMICROELECTRONICS, Manufacturer_Part_Number=ESDALC6V1-1U2, BMS_Part_Number=9151132, ComponentLink1Description=Datasheet, ComponentLink1URL=http://tunmcdsvn.tun.st.com/Component_Datasheet_Library/Trunk/Diodes/STM_ESD_ESDALC6V1-1U2, ECCN_EU=NEC, ECCN_US=EAR99, Internal_Part_Number=MCD-00170, Part_Type=Diode, Provided_By="SUBCO with ST control", Status=Released
U5: library part MCD-00083, "Enhanced single channel power switches with active low enable pin", Alternate_Manufacturer="TEXAS INSTRUMENTS", Alternate_Manufacturer_Part_Number=TPS2041C, Manufacturer=STMICROELECTRONICS, BMS_Part_Number=9159003, ComponentLink1Description=Datasheet, ComponentLink1URL=http://tunmcdsvn.tun.st.com/Component_Datasheet_Library/Trunk/IC/STM_PWR-Switch_STMPS2141STR, ECCN_EU=NEC, ECCN_US=EAR99, Internal_Part_Number=MCD-00083, Manufacturer_Part_Number=STMPS2141STR, Part_Type=IC, Provided_By="SUBCO with ST control", Status=Released
U6: library part MCD-00169, "USB OTG FS ESD protection", Manufacturer=STMICROELECTRONICS, BMS_Part_Number=9151057, ComponentLink1Description=Datasheet, ComponentLink1URL=http://tunmcdsvn.tun.st.com/Component_Datasheet_Library/Trunk/Diodes/STM_ESD_USBLC6-2, ECCN_EU=NEC, ECCN_US=EAR99, Internal_Part_Number=MCD-00169, Manufacturer_Part_Number=USBLC6-2P6, Part_Type=IC, Provided_By="SUBCO with ST control", Status=Released
U7: library part MCD-00085, "Medium-density performance line ARM-based 32-bit MCU with 128KB Flash", Manufacturer=STMICROELECTRONICS, BMS_Part_Number=9175111, ComponentLink1Description=Datasheet, ComponentLink1URL=http://tunmcdsvn.tun.st.com/Component_Datasheet_Library/Trunk/IC/STM_STM32F103CBT6, ECCN_EU=NEC, ECCN_US=3A991A2, Internal_Part_Number=MCD-00085, Manufacturer_Part_Number=STM32F103CBT6, Part_Type=IC, Provided_By="SUBCO with ST control", Status=Released
U8: library part MCD-00088, "IC REG LDO 5V 0.8A SOT223", Manufacturer=STMICROELECTRONICS, Package=SOT-223, BMS_Part_Number=9176133, ComponentLink1Description=Datasheet, ComponentLink1URL=http://tunmcdsvn.tun.st.com/Component_Datasheet_Library/Trunk/IC/STM_LDO_LD1117, ECCN_EU=NEC, ECCN_US=EAR99, Internal_Part_Number=MCD-00088, Manufacturer_Part_Number=LD1117S50TR, Part_Type=IC, Provided_By="SUBCO with ST control", Status=Released
X1: library part MCD-00091, "Crystal 32.768kHz, 6pF, +-20ppm, 50Kohms max, SMD", Manufacturer=NDK, Manufacturer_Part_Number="NX3215SA 32.768KHz EXS00A-MU00525", BMS_Part_Number=9157034, ComponentLink1Description=Datasheet, ComponentLink1URL="http://tunmcdsvn.tun.st.com/Component_Datasheet_Library/Trunk/Crystal_Osc/NDK_Crystal-For-ST_NX3215SA 32.768KHz EXS00A-MU00525 (EXS10B-21238)", ECCN_EU=NEC, ECCN_US=EAR99, Internal_Part_Number=MCD-00091, Order_Code_Digikey=644-1386, Part_Type=Crystal_Osc, Provided_By=SUBCO, Status=Released
X2: library part MCD-00092, "Crystal 8MHz, 8pF, +-20ppm, 500ohms max,  SMD", Manufacturer=NDK, Manufacturer_Part_Number="NX3225GD 8MHz EXS00A-CG04874", BMS_Part_Number=9157029, ComponentLink1Description=Datasheet, ComponentLink1URL="http://tunmcdsvn.tun.st.com/Component_Datasheet_Library/Trunk/Crystal_Osc/NDK_Crystal-For-ST_NX3225GD 8MHz EXS00A-CG04874 (EXS10B-20725)", ECCN_EU=NEC, ECCN_US=EAR99, Internal_Part_Number=MCD-00092, Order_Code_Digikey=644-1391, Part_Type=Crystal_Osc, Provided_By=SUBCO, Status=Released

## Free pads (board coordinates)
  round 0.508 on Mech16: 1(-11.115,-24.702) 1(37.732,-24.702)

## Via types
v1: diameter 0.4, hole 0.2, Top Layer to Bottom Layer, 195 vias

## Nets (pads, with @x,y where several pads share a name; then routed paths per layer and width w, separated by ;. In a path a pad name is that pad's centre, name@x,y a point inside that pad or via, vN(x,y) a via of type N, cw(c..) or ccw(c..) an arc to the next point about the centre after c; other vN are vias at no path point)
3V3: CN4.14 JP1.1 R11.1 R20.2 SB10.2 SB11.2 | length 14.5
  Top Layer w0.5: v1(7.09,32.93) 7.1,32.92 R11.1@7.1,32.25 ; v1(9.56,4.57) 10.98,4.57 11.95,5.54 11.95,6.37 12.75,7.17 15.679,7.17 CN4.14@16.891,8.382 ; v1(12.3,12.95) 13.3,12.95 SB10.2@13.3,13.075 ; JP1.1@14.53,5.809 14.53,6.14 14.58,6.19 14.58,7.02
  Bottom Layer w0.5: v1(9.56,4.57) 10.13,4.57 R20.2@10.2,4.5 10.2,5.742 SB11.2@10.3,5.842
3V3_STLK: C1.2 C2.2 C5.2 C6.2 C7.2 C9.2 CN2.4 LD1.4 Q1.3 SB1.1 U1.5 U7.1 U7.9 U7.24 U7.36 U7.48 | length 16.9
  Top Layer w0.3: LD1.4@1.155,48.363 v1(1.155,49.485) ; v1(3.93,36.06) 4.61,36.06 C2.2@4.65,36.1 ; v1(7.87,28.32) 8.07,28.32 8.3,28.55 C6.2@8.3,28.93 ; Q1.3@9.5,41.402 9.508,41.41 v1(10.63,41.41) ; v1(11.84,36.75) 11.84,37.31 C1.2@11.8,37.35 12.78,37.35 13.017,37.113 SB1.1@13.017,37 ; C5.2@13,30.184 13.624,30.184 v1(13.67,30.23)
  Top Layer w0.5: v1(7.74,25.86) 7.75,25.85 C9.2@8.9,25.85 C7.2@8.9,27 9.49,27 9.74,27.25 U1.5@10.45,27.25
  Bottom Layer w0.3: v1(3.93,36.06) 4.25,36.38 U7.24@5.021,36.38 ; v1(7.87,28.32) v1(7.87,28.32) 8.021,28.469 U7.9@8.021,29.38 ; v1(11.84,36.75) 12.021,36.931 U7.36@12.021,37.88 ; U7.1@12.021,29.38 12.807,29.38 13.658,30.23 v1(13.67,30.23) 13.521,30.379 U7.48@13.521,30.88
5V: C17.2 C19.2 CN4.4 D2.2 D5.2 R23.2 U3.1 U3.6 | length 13.2
  Top Layer w0.5: v1(8.39,6.58) 8.46,6.65 9.99,6.65 10.44,7.1 C17.2@11.1,7.1 11.59,7.1 11.81,7.32 ; C19.2@10.85,6 C17.2@10.85,6.85 ; U3.1@12.55,7.79 11.82,7.79 11.82,7.33 11.81,7.32 ; U3.6@12.55,10.39 12.01,10.39 11.81,10.19 11.81,7.32
  Bottom Layer w0.5: v1(1.73,2.32) R23.2@2.25,1.8 ; D5.2@8.315,5.4 8.315,6.505 v1(8.39,6.58) ; D2.2@11.71,40.51 12.55,40.51 13.01,40.05 13.01,39.8 v1(13.004,39.8)
5V_USB_CHGR: C20.2 CN1.1 D3.1 R3.1 R5.2 R16.2 U5.5 U6.5 | length 42.3
  Top Layer w0.25: R3.1@6.29,43.1 6.32,43.13 v1(6.96,43.13) ; CN1.1@10.317,46.142 10.317,46.647 v1(10.72,47.05)
  Top Layer w0.5: v1(14.15,42.71) 14.89,42.71 15.11,42.49 v1(15.11,41.17) ; v1@14.25,42.67 14.313,42.607 R5.2@14.313,41.96
  Inner 2 w0.5: v1(8.19,44.93) 8.19,45.11 10.13,47.05 v1(10.72,47.05)
  Bottom Layer w0.25: v1@6.91,43.13 v1(6.96,43.13) 7.71,43.13 8.085,43.505 8.085,44.825 v1(8.19,44.93) 8.696,45.435 9.105,45.435 9.355,45.185 9.355,44.15 U6.5@9.4,44.105
  Bottom Layer w0.4: C20.2@13.1,46.95 13.52,46.95 13.75,46.72 13.75,46.134
  Bottom Layer w0.5: R16.2@6.8,47.45 7.28,47.45 7.76,47.93 10.43,47.93 10.72,47.64 v1(10.72,47.05) 10.932,47.262 12.138,47.262 12.45,46.95 C20.2@13.1,46.95 ; 10.05,48.1 U5.5@10.05,49 ; 13.75,46.134 13.75,45.01 13.714,44.974 13.714,43.63 14.15,43.194 v1(14.15,42.71) ; D3.1@14.6,27.17 14.6,28.44 15.59,29.43 15.59,36.869 14.32,38.139 14.32,40.38 v1(15.11,41.17)
5V_USB_STLK: C21.2 D2.1 U5.1 | length 4.8
  Bottom Layer w0.5: U5.1@10.05,46.8 10.05,46.025 10.85,45.225 C21.2@10.85,44.8 10.85,44.33 11.71,43.47 D2.1@11.71,42.65
AIN_1: R10.2 R11.2 U7.10 | length 3.2
  Top Layer w0.3: R10.2@6,31.35 R11.2@7.1,31.35 v1(7.1,30.68)
  Bottom Layer w0.3: v1(7.1,30.68) 7.521,30.259 U7.10@7.521,29.38
AVDD: C13.2 CN4.13 SB10.1 | length 4.2
  Top Layer w0.3: SB10.1@14.4,13.075 14.575,13.075 14.65,13.15 C13.2@14.65,11.9 15.913,11.9 CN4.13@16.891,10.922
E5V: C27.2 D1.1 D4.1 D5.1 U8.2 U8.4 | length 19.6
  Top Layer w0.5: v1(13.65,28.9) 14.4,29.65 D1.1@14.4,30.43
  Bottom Layer w0.5: D5.1@4.285,5.4 4.285,6.66 v1(4.62,6.995) 4.66,7.035 7.235,7.035 7.45,7.25 C27.2@7.45,8.204 U8.4@10.643,8.204 10.3,8.547 10.3,14.554 U8.2@10.643,14.554 ; D4.1@12.8,27.17 12.8,28.05 v1(13.65,28.9)
GND: B1.2 C1.1 C2.1 C3.1 C4.1 C5.1 C6.1 C7.1 C8.1 C9.1 C10.1 C11.1 C12.1 C13.1 C14.1 C15.1 C16.1 C17.1 C18.1 C19.1 C20.1 C21.1 C22.1 C23.1 C24.1 C25.1 C26.1 C27.1 CN1.5 CN1.6 CN1.7 CN1.8 CN1.9 CN1.10 CN1.11 CN2.2 CN3.4 CN4.2 LD1.1 LD2.2 Q2.2 R2.1 R4.1 R9.2 R10.1 R12.1 R13.1 R14.1 R15.1 R21.1 SB2.1 U1.2 U2.5 U2.33 U3.2 U3.EP U4.2 U5.2 U6.2 U7.8 U7.20 U7.23 U7.35 U7.47 U8.1 | length 77
  Top Layer w0.3: v1(2.65,49.47) 2.655,49.465 LD1.1@2.655,48.363 ; v1(4.369,0.72) LD2.2@4.369,1.612 ; C2.1@5.55,36.1 5.6,36.05 v1(6.18,36.05) ; v1(5.99,32.91) 6,32.91 R10.1@6,32.25 ; 6.162,48.842 CN1.11@8.017,48.842 CN1.10@10.017,48.842 CN1.9@12.517,48.842 ; CN1.7@6.517,46.142 CN1.5@7.717,46.142 ; R15.1@6.6,24.25 6.61,24.24 v1(7.23,24.24) ; U4.2@7.012,4.6 7.32,4.6 7.717,4.203 v1(7.717,4.13) ; C18.1@7.25,5.5 7.25,6.21 7.371,6.331 C15.1@7.371,7.6 C16.1@8.25,7.6 ; v1(7.79,25.15) 7.99,24.95 C9.1@8.9,24.95 ; C3.1@8.19,36.15 v1(8.94,36.15) ; C6.1@8.3,29.83 8.3,30.38 v1(8.3,30.35) ; v1(8.33,33.4) 8.343,33.387 SB2.1@8.343,32.38 ; C7.1@8.9,27.9 9.5,27.9 9.99,28.39 v1(10.66,28.39) 10.87,28.6 C8.1@11.4,28.6 ; v1(9.38,6.01) 9.94,6.01 C19.1@9.95,6 ; C4.1@9.4,32.15 9.4,32.82 v1(9.41,32.83) ; v1(9.58,13.05) 9.747,13.217 U2.5@9.747,14.419 9.747,15.491 9.597,15.641 U2.5@9.597,16.319 ; v1(10.6,3.35) 10.6,2.36 10.928,2.032 B1.2@12.297,2.032 ; R12.1@10.643,32.35 10.643,32.943 v1(10.65,32.95) ; v1(11.02,10.41) C12.1@11.02,11.93 ; C17.1@11.1,8 v1(11.1,9.43) ; U1.2@11.4,25.05 11.4,25.98 11.6,26.18 v1(12.26,26.18) ; v1(11.72,38.96) 11.8,38.88 C1.1@11.8,38.25 ; v1(11.8,32.7) R13.1@11.8,32.05 11.9,31.95 R14.1@13,31.95 C5.1@13,31.084 13.634,31.084 14.03,31.48 v1(14.57,31.48) ; R2.1@12.8,43.85 14.589,43.85 CN2.2@14.834,44.094 ; v1(13.02,11.9) C13.1@13.75,11.9 ; R4.1@13.26,41.94 13.26,42.59 v1(13.28,42.61) ; U3.2@13.5,7.79 U3.EP@13.5,9.09 ; v1(13.82,27.45) 13.85,27.45 13.926,27.374 C10.1@13.926,26.698 ; C11.1@13.9,23.682 14.538,23.682 v1(14.57,23.65)
  Bottom Layer w0.2: 9.429,45.67 9.74,45.67 10.3,45.11 10.3,43.77 10.44,43.63 v1(10.49,43.63)
  Bottom Layer w0.25: U6.2@9.4,42.495 9.4,40.5 v1(9.53,40.37)
  Bottom Layer w0.3: v1(4.844,8.204) C27.1@5.75,8.204 ; U7.20@5.021,34.38 v1(6.04,34.38) ; U7.23@5.021,35.88 6.01,35.88 v1(6.18,36.05) ; C26.1@6.272,16.6 6.272,17.122 6.55,17.4 v1(7.98,17.4) ; R21.1@6.521,2.475 6.521,3.291 6.63,3.4 v1(7.73,3.4) 7.98,3.15 Q2.2@9.1,3.15 ; v1(7.23,24.24) 7.42,24.05 9.26,24.05 9.35,24.14 C23.1@9.35,24.6 C22.1@10.35,24.6 ; v1(8.3,30.35) 8.3,30.4 8.521,30.179 U7.8@8.521,29.38 ; U8.1@8.343,14.554 8.343,13.447 8.74,13.05 v1(9.58,13.05) ; U5.2@9.1,46.8 9.1,45.999 9.429,45.67 ; v1(9.636,15.68) 9.85,15.894 C25.1@9.85,16.6 ; v1(10.76,17.91) 11.03,17.91 11.25,17.69 C24.1@11.25,16.7 ; CN1.6@11.517,46.142 11.75,45.909 C21.1@11.75,44.8 ; U7.35@11.521,37.88 11.521,38.801 11.7,38.98 v1(11.72,38.96) ; C20.1@13.1,46.05 13.1,45.45 v1(13.11,45.44) ; U7.47@13.521,31.38 14.47,31.38 v1(14.57,31.48)
  Bottom Layer w0.5: 6.517,44.957 CN1.7@6.517,46.142
  other v1: 15.94,0.61 13.55,0.62 17.83,0.65 0.73,0.68 5.097,0.729 5.13,3.92 0.7,4.86 7.24,6.22 5.517,6.34 2.55,7.16 14.46,8.48 12.77,8.5 14.49,9.61 12.54,9.7 0.74,9.71 15.32,10.89 2.63,11.81 17.85,12.06 0.53,12.08 3.92,12.39 5.65,13.51 3.88,14.61 0.61,14.76 17.77,14.78 3.88,16.05 0.59,17.21 17.8,17.27 2.42,17.32 9.347,18.669 0.65,19.82 17.74,19.97 7.92,20.09 10.68,20.16 15.97,22.04 0.67,22.26 15.98,24.87 17.89,27.65 5.59,28.92 4.36,28.96 0.68,29.91 17.82,30 6.58,30.41 0.66,32.31 17.79,32.4 15.02,32.95 12.2,33.67 7.11,33.73 10.04,34.2 8.13,34.31 3.67,34.71 0.7,35.03 17.8,35.09 10.76,36.13 9.19,36.93 5.66,37.08 0.7,37.49 17.86,37.54 5.86,38.49 3.84,38.69 0.7,40 10.36,40.01 3.55,40.52 5.77,40.7 10.55,42.3 12.84,43.14 4.53,43.18 0.7,43.75 0.76,47.07 4.96,47.22 13.53,47.66 16.11,47.67 13.81,49.56 16.05,49.61 4.23,49.63 1.79,49.64
NetC3_2: C3.2 R7.2 SB7.1 | length 30.4
  Top Layer w0.12: v1(5.57,10.23) 5.57,11.18 SB7.1@5.68,11.29 ; v1(6.79,21.05) 6.79,21.295 6.07,22.015 6.07,24.58 6.175,24.685 7.045,24.685 7.31,24.95 7.31,26.038 7.79,26.518 7.79,27.5 7.43,27.86 7.43,29.71 7.66,29.94 7.66,34.03 7.24,34.45 R7.2@7.24,35.27 R7.2@7.26,35.25
  Top Layer w0.2: R7.2@7.26,35.25 C3.2@8.19,35.25
  Bottom Layer w0.12: v1(5.57,10.23) 6.3,10.96 6.3,14.93 5.56,15.67 5.56,19.337 6.073,19.85 6.42,19.85 6.79,20.22 v1(6.79,21.05)
NetC8_2: C8.2 U1.4 | length 1.4
  Top Layer w0.3: C8.2@12.3,28.6 12.35,28.55 U1.4@12.35,27.25
NetC10_2: C10.2 C11.2 D3.2 D4.2 U1.1 U1.3 | length 8.3
  Top Layer w0.12: U1.1@10.45,25.05 10.45,24.34 10.59,24.2 12.24,24.2 12.35,24.31 U1.3@12.35,25.05
  Top Layer w0.5: U1.3@12.35,25.05 13.167,25.05 13.297,25.18 13.81,25.18 v1(13.85,25.22) v1@13.9,25.27 ; C11.2@13.9,24.582 v1@13.9,25.27 ; C10.2@13.926,25.798 13.926,25.296 v1@13.9,25.27
  Bottom Layer w0.5: D4.2@12.8,25.03 13.22,25.03 13.41,25.22 v1(13.85,25.22) 14.04,25.03 D3.2@14.6,25.03
NetC12_2: C12.2 C14.2 SB11.1 U3.4 | length 10.3
  Top Layer w0.5: C12.2@11.92,11.93 C14.2@11.92,11.19 12.32,11.19 12.5,11.01 14.24,11.01 14.45,10.8 U3.4@14.45,10.39
  Bottom Layer w0.5: SB11.1@11.4,5.842 13.47,7.912 13.47,10.06 v1(12.5,11.03)
NetC15_2: C15.2 SB8.1 X1.1 | length 4
  Top Layer w0.2: C15.2@6.471,7.6 6.471,9.121 X1.1@6.55,9.2 6.88,9.53 6.88,11.08 SB8.1@7.1,11.3
NetC16_2: C16.2 SB9.1 X1.2 | length 4
  Top Layer w0.2: SB9.1@8.5,11.3 8.5,10.89 8.72,10.67 8.72,9.53 X1.2@9.05,9.2 9.15,9.1 C16.2@9.15,7.6
NetCN1_4: CN1.4 R2.2 | length 8
  Top Layer w0.12: CN1.4@8.367,46.142 8.367,47.037 9.042,47.712 11.869,47.712 12.72,46.861 12.72,44.83 R2.2@12.8,44.75
NetD1_2: D1.2 R8.1 | length 2.3
  Top Layer w0.3: R8.1@13.017,33.7 13.59,33.7 13.73,33.56 13.73,32.74 13.9,32.57 D1.2@14.4,32.57
NetLD1_2: LD1.2 R17.2 | length 1.8
  Top Layer w0.3: v1(2.65,46.48) 2.655,46.485 LD1.2@2.655,45.363
  Bottom Layer w0.3: v1(2.65,46.48) 2.65,45.9 R17.2@2.7,45.85
NetLD1_3: LD1.3 R18.2 | length 1.8
  Top Layer w0.3: LD1.3@1.155,45.363 1.2,45.408 v1(1.2,46.5)
  Bottom Layer w0.3: R18.2@1.2,45.85 v1(1.2,46.5)
NetLD2_1: LD2.1 R23.1 | length 3.7
  Top Layer w0.3: v1(3.16,1.11) 3.16,2.69 3.582,3.112 LD2.1@4.369,3.112
  Bottom Layer w0.3: R23.1@3.15,1.8 3.16,1.79 v1(3.16,1.11)
NetLD3_1: LD3.1 R20.1 | length 4.2
  Top Layer w0.3: v1(11.88,4.48) 12.16,4.2 13.93,4.2 14.326,3.804 LD3.1@14.326,3.112
  Bottom Layer w0.3: R20.1@11.1,4.5 11.86,4.5 v1(11.88,4.48)
NetLD3_2: LD3.2 Q2.3 | length 3.4
  Top Layer w0.3: v1(13.5,1.57) 14.368,1.57 LD3.2@14.326,1.612
  Bottom Layer w0.3: Q2.3@11.3,2.2 12.87,2.2 v1(13.5,1.57)
NetLD4_1: LD4.1 R3.2 | length 1.3
  Top Layer w0.3: LD4.1@5.1,44.3 5.1,43.64 5.45,43.29 R3.2@5.45,43.1
NetLD4_2: LD4.2 U5.3 | length 3.6
  Top Layer w0.5: LD4.2@6.6,44.3 7.44,44.3 v1(7.46,44.32)
  Bottom Layer w0.5: v1(7.46,44.32) 7.46,45.06 8.15,45.75 U5.3@8.15,46.8
NetQ1_1: Q1.1 R4.2 R5.1 R6.1 | length 3.6
  Top Layer w0.3: Q1.1@11.7,40.452 12.602,40.452 13.2,41.05 14.3,41.05 R6.1@14.3,40.25
NetQ1_2: Q1.2 R1.2 | length 1.5
  Top Layer w0.3: Q1.2@11.7,42.352 R1.2@11.7,43.85
NetQ2_1: Q2.1 R21.2 R22.2 | length 2.9
  Bottom Layer w0.3: R21.2@7.421,2.475 R22.2@7.421,1.25 Q2.1@9.1,1.25
NetR7_1: R7.1 U7.29 | length 2.8
  Top Layer w0.2: R7.1@7.24,36.17 7.24,36.66 7.508,36.928 v1(8.52,36.928)
  Bottom Layer w0.2: v1(8.52,36.928) v1(8.52,36.928) U7.29@8.521,37.88
NetR8_2: R8.2 R9.1 SB1.2 U7.39 | length 5.3
  Top Layer w0.3: v1(11.99,35.67) 13.004,35.67 13.017,35.657 R8.2@13.017,34.6 14.55,34.6 R9.1@14.6,34.65
  Bottom Layer w0.3: v1(11.99,35.67) 12.28,35.38 U7.39@13.521,35.38
NetR12_2: R12.2 U7.3 | length 2.2
  Top Layer w0.3: R12.2@10.643,31.45 10.643,30.807 v1(11.01,30.44)
  Bottom Layer w0.3: v1(11.01,30.44) 11.021,30.429 U7.3@11.021,29.38
NetR13_2: R13.2 U7.2 | length 1.9
  Top Layer w0.3: v1(11.79,30.5) 11.79,31.14 R13.2@11.8,31.15
  Bottom Layer w0.3: U7.2@11.521,29.38 11.521,30.231 v1(11.79,30.5)
NetR14_2: R14.2 U7.44 | length 1.9
  Top Layer w0.3: v1(12.34,32.86) 12.99,32.86 R14.2@13,32.85
  Bottom Layer w0.3: v1(12.34,32.86) 12.36,32.88 U7.44@13.521,32.88
NetR15_2: R15.2 SB6.1 | length 1.8
  Top Layer w0.12: SB6.1@5.2,24.6 5.2,24.82 5.53,25.15 R15.2@6.6,25.15
NetR22_1: R22.1 SB12.2 SB13.2 | length 12.8
  Top Layer w0.3: v1(8,0.729) 10.209,0.729 v1(10.57,1.09)
  Bottom Layer w0.3: R22.1@6.521,1.25 6.521,0.739 6.665,0.595 7.866,0.595 v1(8,0.729) ; v1(10.57,1.09) 10.58,1.1 15.7,1.1 16.1,1.5 SB13.2@16.1,2.4 SB12.2@17.5,2.4